# Altium PCB 0-99-pcb.PcbDoc
Units mm, origin at the board's own origin, x right, y up, seen from the top; angles counter-clockwise.
Board outline 100 x 100 mm, 2 copper layers (Top Layer, Bottom Layer); 65 components, 69 nets, 218 pads, 30 vias.
Unrouted connection lines stored in the file: 1.
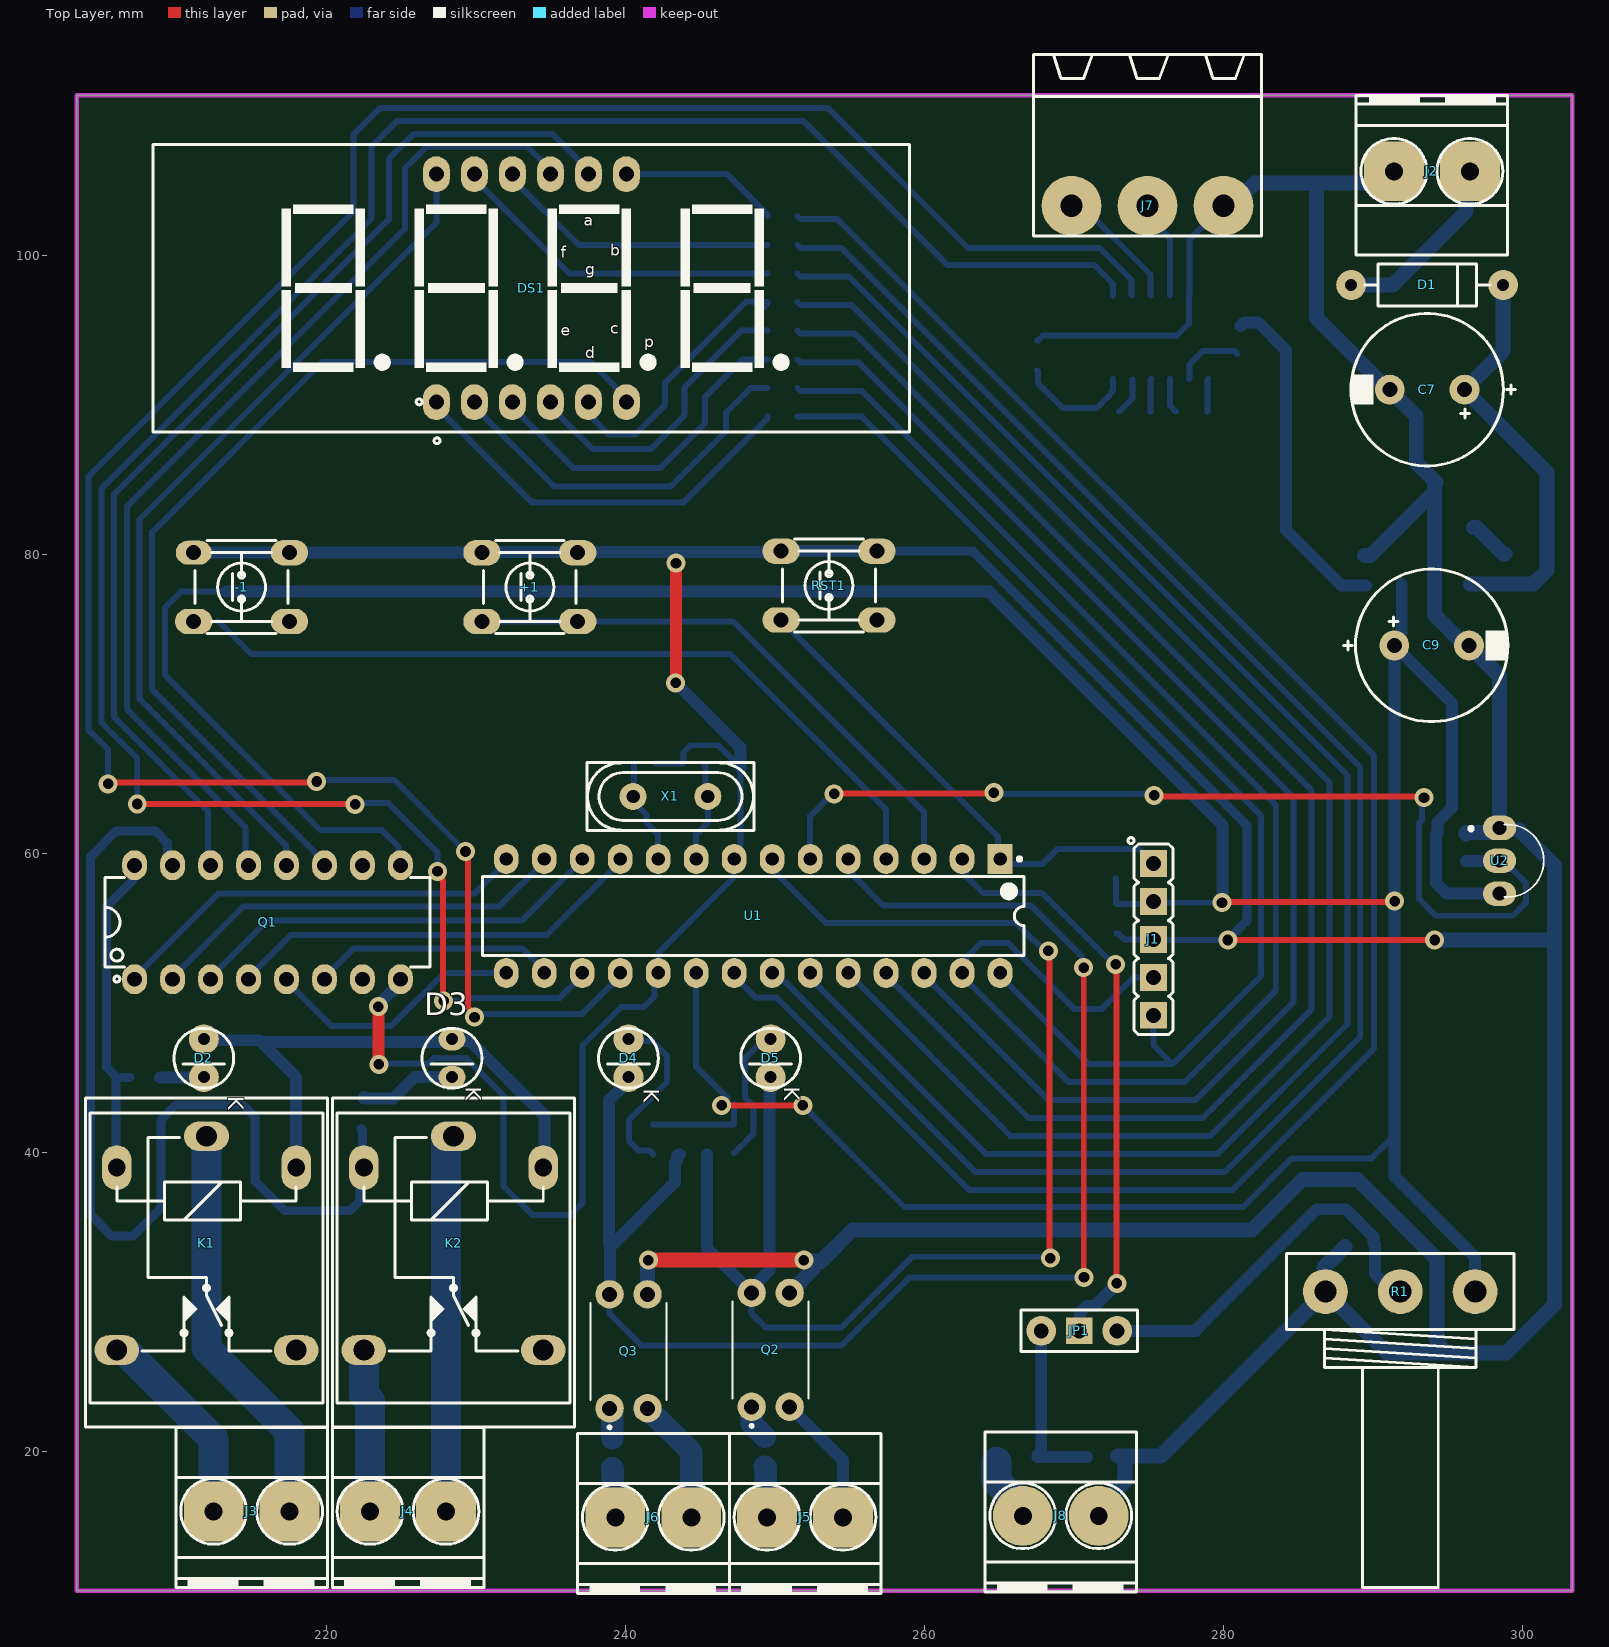
[diagram p0: Top Layer view]
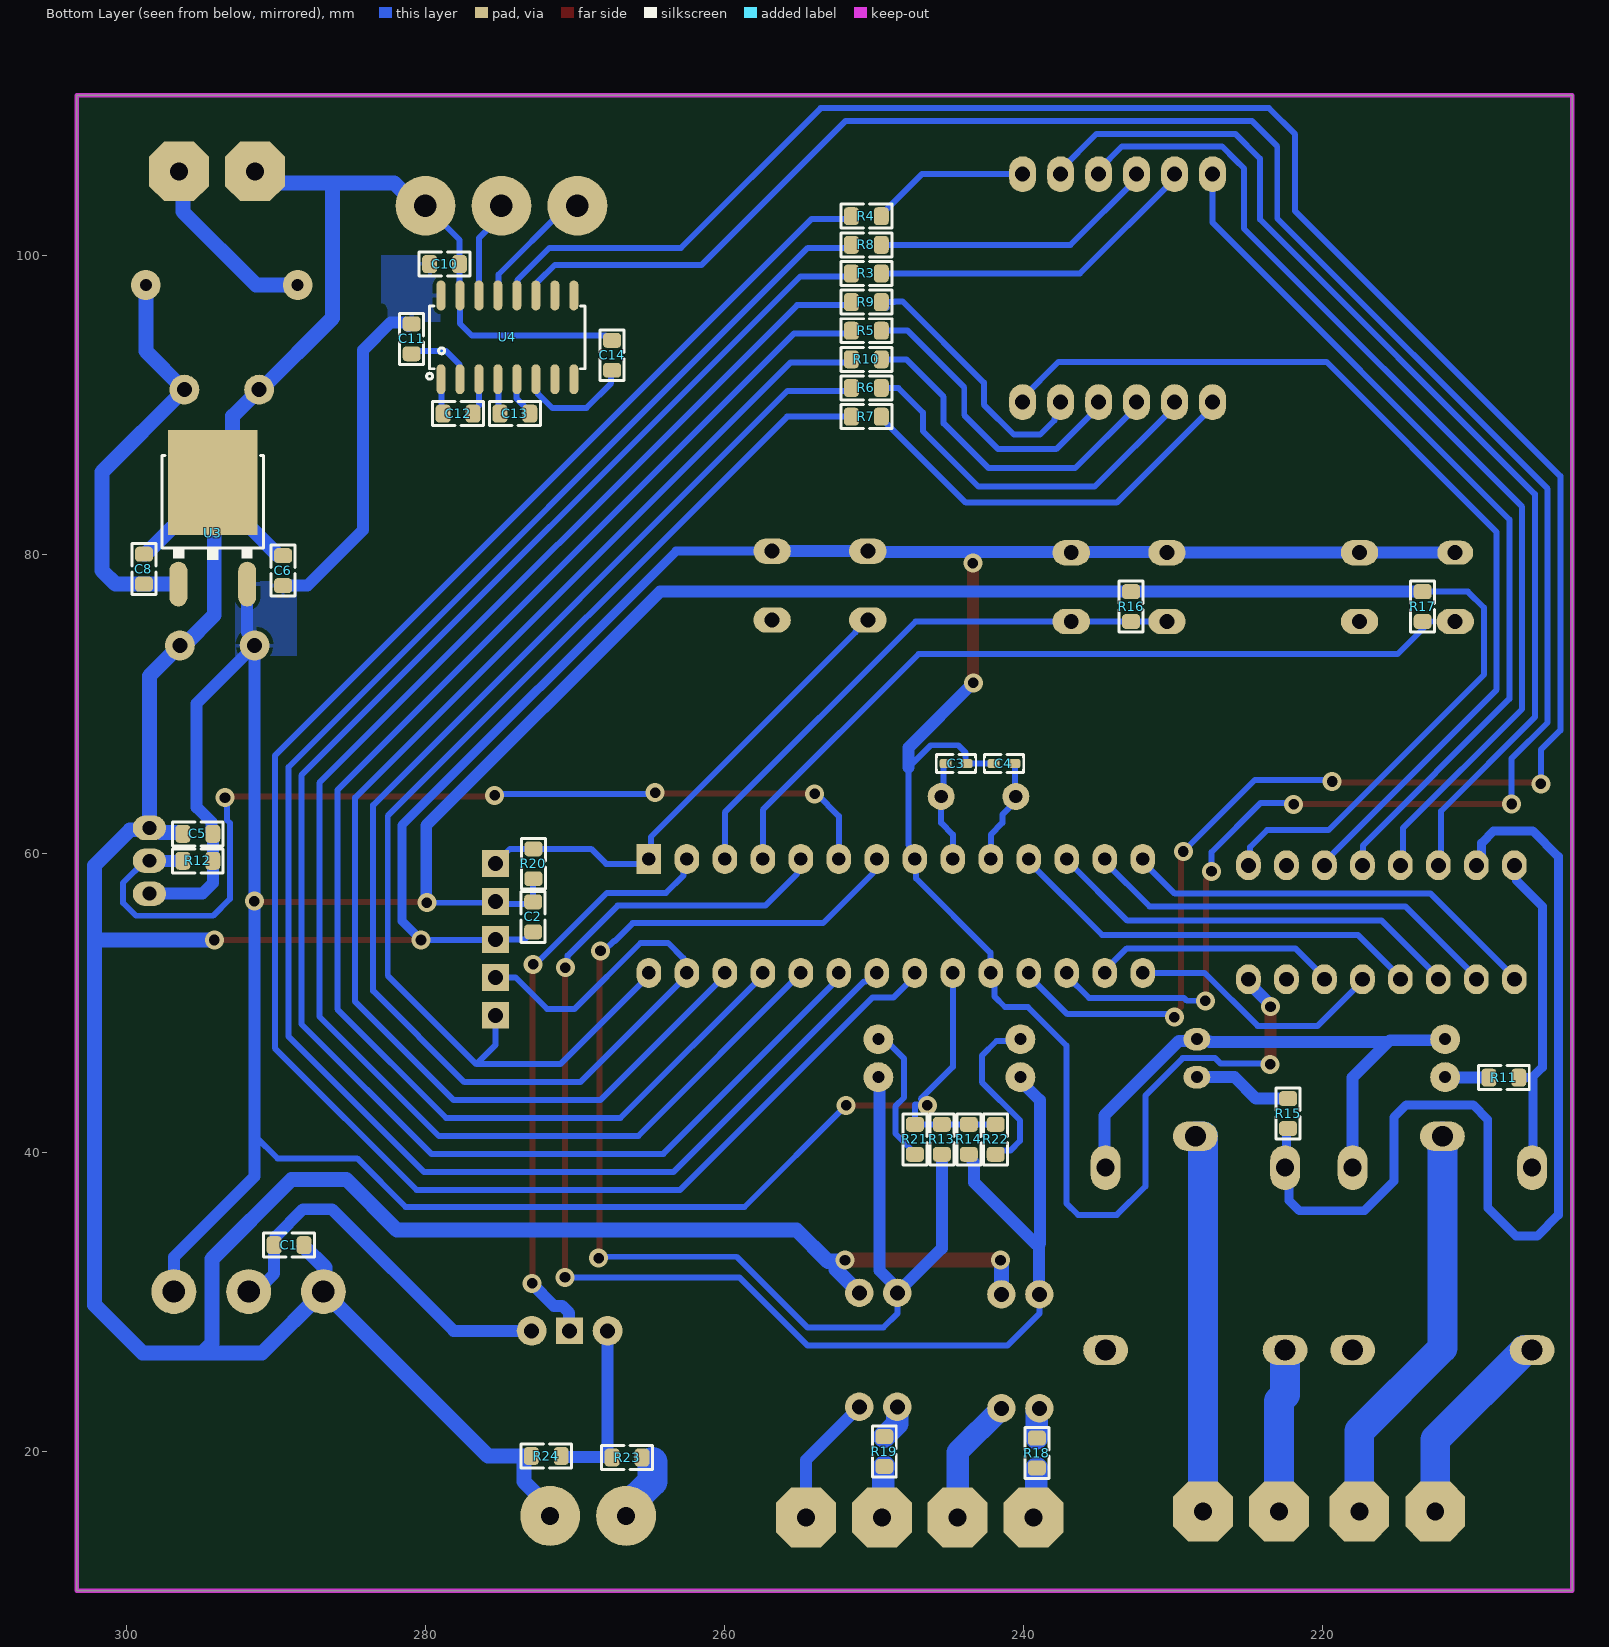
[diagram p1: Bottom Layer view, seen from below]

## Layer stack, top to bottom
Top Solder: solder mask 0.0102, Solder Resist, Dk 3.5
Top Layer: signal copper 0.0356
Dielectric 1: dielectric 0.32, FR-4, Dk 4.8
Bottom Layer: signal copper 0.0356
Bottom Solder: solder mask 0.0102, Solder Resist, Dk 3.5

## Board outline
203.3,10.7 203.3,110.7 303.3,110.7 303.3,10.7

## Design rules (kind name [scope] priority, off if disabled: settings)
Clearance [All] p1: gap=0.3 ignorepadtopadclearanceinfootprint=FALSE
ComponentClearance [All] p1 off: gap=0.254 collisioncheckmode=3 verticalgap=0.254 showdistances=FALSE
MinimumSolderMaskSliver [All] p1: minsoldermaskwidth=0.1
PolygonConnect [All] p1: connectstyle=Relief reliefconductorwidth=0.254 reliefentries=4 polygonreliefangle="90 Angle" airgapwidth=0.254
RoutingVias [All] p1: holewidth=0.711 width=1.27 viastyle="Through Hole" minholewidth=0.711 minwidth=1.27 maxholewidth=0.711 maxwidth=1.27
SilkToSolderMaskClearance [IsText] p1: minsilkscreentomaskgap=0.254 clearancetoexposedcopper=TRUE
SolderMaskExpansion [All] p1: expansion=0.102 istentingtop=FALSE
Width [All] p1: maxlimit=2 minlimit=0.4 preferedwidth=0.6
27 further rules are at their usual default settings.

## Classes and differential pairs
component class MAX232_0-99_Counter: C10 C11 C12 C13 C14 J7 U4
component class 0-99_Counter: +1 -1 C1 C2 C3 C4 C5 C6 C7 C8 C9 D1 D2 D3 D4 D5 DS1 J1 J2 J3 J4 J5 J6 J8 JP1 K1 K2 Q1 Q2 Q3 R1 R3 R4 R5 R6 R7 R8 R9 R10 R11 R12 R13 R14 R15 R16 R17 R18 R19 R20 R21 R22 R23 R24 RST1 U1 U2 U3 X1 Y1

## Components (designator, comment, footprint, x,y, rotation, side; value= is the part's Value field where it differs from the comment)
+1 "Tactile 4PIN 6X6mm H5mm (THD)" SWPBT_SPDT_6X6X5SKHH#1 233.6,77.8 r0 top
-1 "Tactile 4PIN 6X6mm H5mm (THD)" SWPBT_SPDT_6X6X5SKHH#2 214.325,77.8 r0 top
C1 "-F" C0805 289.1,33.8 r180 bottom
C2 "-F" C0805 272.775,55.75 r90 bottom
C3 "22 pF" C0603 244.5,66 r180 bottom
C4 "22 pF" C0603 241.3,66 r0 bottom
C5 "-F" C0805 295.2,61.3 r0 bottom
C6 "-F" C0805 289.5,78.9 r270 bottom
C7 "100uF" C_EL_10X12 293.6,91 r180 top
C8 "-F" C0805 298.8,79 r270 bottom
C9 "100uF" C_EL_10X12 293.9,73.9 r0 top
C10 "-F" C0805 278.7,99.4 r0 bottom
C11 "-F" C0805 280.9,94.4 r270 bottom
C12 "-F" C0805 277.8,89.4 r0 bottom
C13 "-F" C0805 274,89.4 r0 bottom
C14 "-F" C0805 267.5,93.3 r270 bottom
D1 "1N4007" D_AX04_DO41 293.6,98 r0 top
D2 "LED0" LED3MM#1 211.8,46.3 r270 top
D3 "LED0" LED3MM#2 228.4,46.3 r270 top
D4 "LED1" LED3MM#1 240.2,46.3 r270 top
D5 "LED1" LED3MM#1 249.7,46.3 r270 top
DS1 "7SEG_4DIGIT_CC" 7SEGX4_12 233.7,97.787 r0 top locked
J1 "HDR1X5" HDR_M_1X5 275.3,54.25 r270 top value=HDRM5
J2 "CONN_TB2" TBG_2#1 293.916,105.6 r0 top
J3 "CONN_TB2" TBG_2#1 215,16 r180 top
J4 "CONN_TB2" TBG_2#1 225.452,16 r180 top
J5 "CONN_TB2" TBG_2#1 252,15.6 r180 top
J6 "CONN_TB2" TBG_2#1 241.855,15.6 r180 top
J7 "CONN_TB3" MSTB_3 274.9,103.3 r0 top
J8 "CONN_TB2" TBG_2#2 269.1,15.7 r180 top
JP1 "JMPHDR3PIN" JP_3 270.335,28.075 r180 top
K1 "RELAY_SPDT" REL_SPDT_5_2216 211.98,38.98 r0 top
K2 "RELAY_SPDT" REL_SPDT_5_2216 228.497,38.98 r0 top
Q1 "ULN2003" DIP_16 216.06,55.39 r90 top
Q2 "PC817C" DIP762W50P254L650H458Q4B 249.7,26.8 r90 top
Q3 "PC817C" DIP762W50P254L650H458Q4B 240.2,26.7 r90 top
R1 "POT10K" VOL_R 291.8,30.7 r180 top
R3 "10K" R0805 250.5,98.771 r180 bottom
R4 "10K" R0805 250.5,102.6 r180 bottom
R5 "10K" R0805 250.5,94.943 r180 bottom
R6 "10K" R0805 250.5,91.114 r180 bottom
R7 "10K" R0805 250.5,89.2 r180 bottom
R8 "10K" R0805 250.5,100.686 r180 bottom
R9 "10K" R0805 250.5,96.857 r180 bottom
R10 "10K" R0805 250.5,93.029 r180 bottom
R11 "" R0805 207.875,45 r180 bottom
R12 "10K" R0805 295.2,59.5 r180 bottom
R13 "10K" R0805 245.45,40.875 r90 bottom
R14 "10K" R0805 243.65,40.875 r90 bottom
R15 "" R0805 222.3,42.6 r90 bottom
R16 "10K" R0805 232.8,76.5 r90 bottom
R17 "10K" R0805 213.3,76.5 r90 bottom
R18 "10K" R0805 239.1,19.9 r90 bottom
R19 "10K" R0805 249.3,20 r270 bottom
R20 "10K" R0805 272.76,59.3 r270 bottom
R21 "10K" R0805 247.25,40.875 r90 bottom
R22 "10K" R0805 241.85,40.875 r90 bottom
R23 "10K" R0805 266.5,19.6 r180 bottom
R24 "10K" R0805 271.9,19.7 r0 bottom
RST1 "Tactile 4PIN 6X6mm H5mm (THD)" SWPBT_SPDT_6X6X5SKHH#1 253.6,77.9 r0 top
U1 "PIC16F876A-E/SP" SPDIP300-SP28 248.53,55.81 r270 top
U2 "DS18B20" TO-92-TO92127P495H2044-3 299.2,59.5 r270 top
U3 "L78M05CDT" DPAK_3 294.2,78 r180 bottom
U4 "MAX232" SO_16 274.5,94.5 r90 bottom
X1 "XTL_12MHz" XTLT_2 243,63.8 r180 top locked

## Footprints (in the part's own frame and the unit in brackets; to place one, negate y for a bottom-side part, rotate by r counter-clockwise, add the part's x,y. Pads: shape width x height; smd on the part's side, far side on the other; paste and mask are expansions set on the pad)
7SEGX4_12 [mm] "7SEG 4DIGIT 12pin Pitch: 2.54mm    5641 0.56\", 19X50.3mm"
  oval 1.8x2.4 hole 1: 1(-6.35,-7.62) 2(-3.81,-7.62) 3(-1.27,-7.62) 4(1.27,-7.62) 5(3.81,-7.62) 6(6.35,-7.62) 7(6.35,7.62) 8(3.81,7.62) 9(1.27,7.62) 10(-1.27,7.62) 11(-3.81,7.62) 12(-6.35,7.62)
  silkscreen extent -25.3,-10.4 25.3,9.6, body extent -25.2,-9.5 25.2,9.5, height 8
C0603 [mm] "CHIP Capacitor, 1.6X0.8mm, 0603"
  rrect50% 0.8x0.6 smd mask+0.075: 1(-0.7,0) 2(0.7,0)
  silkscreen extent -1.33,-0.6 1.32,0.6, body extent -0.8,-0.4 0.8,0.4, height 0.9
C0805 [mm] "CHIP Capacitor, 2.0X1.3mm, 0805"
  rrect50% 1x1.2 smd mask+0.075: 1(-1,0) 2(1,0)
  Top Layer pour cut-out: -0.5,0.8 0.5,0.8 0.5,-0.8 -0.5,-0.8
  silkscreen extent -1.7,-0.8 1.7,0.8, body extent -1,-0.63 1,0.62, height 1
C_EL_10X12 [mm] "Cap Elec, D10.0X12.0H pitch: 5.0mm"
  round 2 hole 1: 1(-2.5,0) 2(2.5,0)
  silkscreen extent -5.9,-5.1 5.1,5.1, body extent -5.07,-5.08 5.05,5.04, height 13.7
D_AX04_DO41 [mm] "DIODE 0.4 INCH SPACING DO-41"
  round 2 hole 0.8: 1(-5.08,0) 2(5.08,0)
  silkscreen extent -4.2,-1.4 4.2,1.4, body extent -5.68,-1.32 5.68,1.4, height 2.85
DIP762W50P254L650H458Q4B [mm]
  round 1.9 hole 1: 1(-3.81,1.27) 2(-3.81,-1.27) 3(3.81,-1.27) 4(3.81,1.27)
  silkscreen extent -5.18,-2.54 3.25,2.54, body extent -3.94,-2.29 3.94,2.29, height 4.8
DIP_16 [mm] "DIP, pitch 2.54mm, 300mil Width"
  oval 2x1.65 hole 1: 1(-3.81,8.89) 2(-3.81,6.35) 3(-3.81,3.81) 4(-3.81,1.27) 5(-3.81,-1.27) 6(-3.81,-3.81) 7(-3.81,-6.35) 8(-3.81,-8.89) 9(3.81,-8.89) 10(3.81,-6.35) 11(3.81,-3.81) 12(3.81,-1.27) 13(3.81,1.27) 14(3.81,3.81) 15(3.81,6.35) 16(3.81,8.89)
  silkscreen extent -4,-10.87 3,10.87, body extent -3.93,-10 3.94,10, height 5.1
DPAK_3 [mm] "D-PAK (TO-252), 3-Pads, Body 6.2x6.7mm"
  oval 1.2x3 smd: 1(-2.3,0) 3(2.3,0)
  rect 6x7 smd: 4(0,6.8)
  silkscreen extent -3.4,1.63 3.4,8.6, body extent -3.37,-0.5 3.37,9.6, height 2.37
HDR_M_1X5 [mm] "Connector; Header; 5 Position"
  rect 1.8x1.8 hole 1 mask+0.1: 1(-5.08,0) 2(-2.54,0) 3(0,0) 4(2.54,0) 5(5.08,0)
  silkscreen extent -6.8,-1.7 6.38,1.3, body extent -6.35,-1.27 6.35,1.27, height 8.54
JP_3 [mm] "Jumper Header 2.54mm Pitch, 3PIN, Vertical"
  round 2 hole 1: 1(-2.54,0) 3(2.54,0)
  rect 1.8x1.8 hole 1: 2(0,0)
  silkscreen extent -3.9,-1.4 3.9,1.4, body extent -3.82,-1.27 3.8,1.27, height 8.57
LED3MM#1 [mm] "LED THD 3MM"
  round 2 hole 0.8: 1(-1.27,0) 2(1.27,0)
  silkscreen extent -2,-2 2,2, body extent -1.9,-1.9 1.6,1.9, height 6.5
LED3MM#2 [mm] "LED THD 3MM"
  oval 1.5x1.8 hole 0.8: 1(-1.27,0) 2(1.27,0)
  silkscreen extent -2,-2 2,2, body extent -1.9,-1.9 1.6,1.9, height 6.5
MSTB_3 [mm] "PHOENIX MSTB 2, 5-G, 5.08mm pitch, 3pin"
  round 4 hole 1.5: 1(-5.08,0) 2(0,0) 3(5.08,0)
  silkscreen extent -7.62,-2.03 7.62,10.1, body extent -7.5,-2 7.5,10, height 8.6
R0805 [mm] "CHIP RESISTOR 1/8 WATT ,2.0X1.3mm, 0805, 2012"
  rrect50% 1x1.2 smd mask+0.05: 1(-1,0) 2(1,0)
  Top Layer pour cut-out: -0.5,0.8 0.5,0.8 0.5,-0.8 -0.5,-0.8
  silkscreen extent -1.7,-0.8 1.7,0.8, body extent -1.15,-0.68 1.15,0.67, height 0.76
REL_SPDT_5_2216 [mm] "RELAY SPDT, OMRON G5LE SERIES, 22X16mm and 18.8x15.4mm, HJR-3FF, RAS-1215"
  oval 3x2 hole 1.4: 1(0,2.1) 2(6,-12.2) 3(-6,-12.2)
  oval 2x3 hole 1.2: 4(-6,0) 5(6,0)
  silkscreen extent -8.1,-17.35 8.1,4.65, body extent -7.95,-15.75 7.95,3.75, height 15.5
SO_16 [mm] "SOP, SOIC, 3.9mm width, 1.27mm pitch,"
  oval 2x0.6 smd: 1(-2.8,4.445) 2(-2.8,3.175) 3(-2.8,1.905) 4(-2.8,0.635) 5(-2.8,-0.635) 6(-2.8,-1.905) 7(-2.8,-3.175) 8(-2.8,-4.445) 9(2.8,-4.445) 10(2.8,-3.175) 11(2.8,-1.905) 12(2.8,-0.635) 13(2.8,0.635) 14(2.8,1.905) 15(2.8,3.175) 16(2.8,4.445)
  silkscreen extent -2.8,-5.2 2.1,5.4, body extent -3.1,-4.95 3.1,4.95, height 1.7
SPDIP300-SP28 [mm] "DIP, 28-Leads, Row Spacing 7.62mm, Pitch 2.54mm, Body 34.9x6.8mm"
  rect 2x1.65 hole 0.9: 1(-3.81,16.51)
  oval 2x1.65 hole 0.9: 2(-3.81,13.97) 3(-3.81,11.43) 4(-3.81,8.89) 5(-3.81,6.35) 6(-3.81,3.81) 7(-3.81,1.27) 8(-3.81,-1.27) 9(-3.81,-3.81) 10(-3.81,-6.35) 11(-3.81,-8.89) 12(-3.81,-11.43) 13(-3.81,-13.97) 14(-3.81,-16.51) 15(3.81,-16.51) 16(3.81,-13.97) 17(3.81,-11.43) 18(3.81,-8.89) 19(3.81,-6.35) 20(3.81,-3.81) 21(3.81,-1.27) 22(3.81,1.27) 23(3.81,3.81) 24(3.81,6.35) 25(3.81,8.89) 26(3.81,11.43) 27(3.81,13.97) 28(3.81,16.51)
  silkscreen extent -3.93,-18.1 2.65,18.1, body extent -3.55,-18.1 3.55,18.1, height 5.08
SWPBT_SPDT_6X6X5SKHH#1 [mm] "SWITCH, PUSHBUTTON, THD, SPDT, 6X6X5.0 mm Height ; 1,000,000 cycles ; 0.98N Force, SKHHAKA010"
  oval 2.5x1.7 hole 1 mask+0.1: 1(-3.2,2.3) 2(-3.2,-2.3) 3(3.2,-2.3) 4(3.2,2.3)
  silkscreen extent -3.1,-3.1 3.1,3.1, body extent -3.95,-3.1 3.95,3.1, height 5.03
SWPBT_SPDT_6X6X5SKHH#2 [mm] "SWITCH, PUSHBUTTON, THD, SPDT, 6X6X5.0 mm Height ; 1,000,000 cycles ; 0.98N Force, SKHHAKA010"
  oval 2.4x1.6 hole 1 mask+0.1: 1(-3.2,2.3)
  oval 2.5x1.7 hole 1 mask+0.1: 2(-3.2,-2.3) 3(3.2,-2.3) 4(3.2,2.3)
  silkscreen extent -3.1,-3.1 3.1,3.1, body extent -3.95,-3.1 3.95,3.1, height 5.03
TBG_2#1 [mm] "Terminal Block Green"
  oct 4x4 hole 1.2: 1(-2.54,0) 2(2.54,0)
  silkscreen extent -5.08,-5.6 5.05,5.08, body extent -5,-5.5 5,5, height 14
TBG_2#2 [mm] "Terminal Block Green"
  round 4 hole 1.2: 1(-2.54,0) 2(2.54,0)
  silkscreen extent -5.08,-5.6 5.05,5.08, body extent -5,-5.5 5,5, height 14
TO-92-TO92127P495H2044-3 [mm]
  oval 1.65x2.22 hole 0.93: 1(-2.2,-0.76) 2(0,-0.76) 3(2.2,-0.76)
  silkscreen extent -2.43,-2.79 2.43,2.2, body extent -2.28,-1.84 2.28,1.78, height 20.45
VOL_R [mm] "VOULME RIGHT ANGLE"
  round 3 hole 1.5: 1(-5,0) 2(0,0) 3(5,0)
  silkscreen extent -7.62,-2.54 7.62,19.78, body extent -10.76,-5 10.93,27.8, height 24.54
XTLT_2 [mm] "Crystal PTH HC49S"
  round 1.8 hole 0.9: 1(-2.5,0) 2(2.5,0)
  silkscreen extent -5.59,-2.29 5.59,2.29, body extent -5.67,-2.32 5.67,2.33, height 3.6

## Part data
+1 -1 RST1: "Tactile Switch SPST-NO Top Actuated Surface Mount", PartNumber="PTS645SH50SMTR92 LFS"
C1 C2 C5 C6 C8 C10 C11 C12 C13 C14: library part CAP_SMD_MLCC_0805, "CAP, MLCC, -F, -V, MATERIAL, -%, 0201", ASSEMBLY=ASSEMBLY, MANF=-, MANF_P#=MANF_PART#, PARAM="-, -%", PARAM2=-V, PRICE="100= 1$"
C3 C4: library part CERAMIC-1NF-50V-5%-C0G(0603), MPN=GRM1885C1H102JA01D
C7 C9: library part CAP_THD_EL, "CAP, THD, ELEC,", ASSEMBLY=ASSEMBLY, DESC=DESCRIPTION, DIST#=MOUSER, MANF=MANF, MANF_P#=MANF_PART#, PARAM=25V, PARAM2=20%, PRICE="10= 5$"
D1: library part DIODE_THD_1N4007, "DIODE, GENERAL PURPOSE, 1000V/1A", ASSEMBLY=ASSEMBLY, DESC=DESCRIPTION, MANF=Diodes, MANF_P#=1N4007, PARAM="1000V, 1.15V", PARAM2=1.5A, PRICE=PRICE
D2 D3: "Typical INFRARED GaAs LED", LatestRevisionDate=08-Jul-2005, LatestRevisionNote="Mech Layer 1 removed.", PackageDescription="LED; 2 Leads", PackageReference=LED-0, Published=8-Jun-2000, Publisher="Altium Limited"
D4 D5: "Typical RED GaAs LED", LatestRevisionDate=08-Jul-2005, LatestRevisionNote="Mech Layer 1 removed.", PackageDescription="LED; 2 Leads", PackageReference=LED-1, Published=8-Jun-2000, Publisher="Altium Limited"
DS1: "7SEGMENT, 4DIGIT, common cathode 5641", MANF_P#=DPY-4CK
J1: library part HDR_M_1X5, "CONN, HEADER, Male, pitch: 2.54mm, 5POS"
J2 J3 J4 J5 J6 J8: "CONN, TERMINAL BLOCK, 5.08mm pitch"
J7: library part CONN_MSTB_3, "CONN, PHOENIX MSTB, 5-G, 5.08mm pitch"
JP1: library part JUMPER_HDR_3P, "JUMPER, HEADER 3PIN", MANF=MANF, MANF_P#=MANF_P#
K1 K2: library part RELAY_SPST_5_2216_G5LE, "Relay, SPDT, 5P, 22X16mm, 120V/10A", MANF=OMRON, MANF_P#=G5LE-1, PARAM="12V, 50mA", PARAM2="250VAC, 10A", PRICE=PRICE
Q1: library part ULN2004_DIP16, "Darlington, 7-CH, 50V, 0.5A, 6~15V CMOS/PMOS", MANF=ST, MANF_P#=ULN2004A, PARAM="7-CH, 50V, 0.5A", PARAM2="6~15V CMOS/PMOS"
Q2 Q3: "Optoisolator Transistor Output 5000Vrms 1 Channel 4-DIP", Package="DIP-4 Taiwan Semiconductor", Availability=Unavailable, MF="Taiwan Semiconductor", MP=PC817C, PRICE=None, SnapEDA_Link=https://www.snapeda.com/parts/PC817C/Taiwan%20Semiconductor%20Corporation/view-part/2816187/?ref=snap
R1: library part RES_THD_POT_VOL, "RESISTOR, THD, Potentiometer Volume"
R3 R4 R5 R6 R7 R8 R9 R10 R13 R14 R17 R20 R21 R22 R23 R24: library part RES_THD, "RESISTOR, THD", ASSEMBLY=ASSEMBLY, DESC=DESCRIPTION, DIST#=MOUSER, MANF="KOA SPEER", MANF_P#=RK73H1ETTP4701F, PARAM=0.063W, PARAM2=1%, PRICE="100= 0.5$"
R11 R15: library part RES_THT
R12 R16 R18 R19: library part RES_THD, "RESISTOR, THD 4K7", ASSEMBLY=ASSEMBLY, DESC=DESCRIPTION, DIST#=MOUSER, MANF="KOA SPEER", MANF_P#=RK73H1ETTP4701F, PARAM=0.063W, PARAM2=1%, PRICE="100= 0.5$"
U1: "Enhanced FLASH Microcontroller, 8K (x14-Bit words) FLASH, 368 Bytes RAM, 28-Pin PDIP 300mil, Standard VDD Range, Extended Temperature", Supplier Part Number 1=PIC16F876A-E/SP-ND, ComponentAvailability="Unknown. Contact manufacturer to determine status.", ComponentLink1Description=Datasheet, ComponentLink1URL=http://ww1.microchip.com/downloads/en/DeviceDoc/39582b.pdf, ComponentLink2Description="Packaging Specification", ComponentLink2URL=http://www.microchip.com/stellent/groups/techpub_sg/documents/packagingspec/en012702.pdf, ComponentLink3Description="Microchip.com Home", ComponentLink3URL=http://www.microchip.com/, DatasheetVersion="revB, Oct-2003", LatestRevisionDate=29-Jan-2009, LatestRevisionNote="Sch. layout revised. 3D Model Removed.", PackageDescription="28-Lead Skinny Plastic Dual In-Line (SP) - 300 mil Body [SPDIP]", PackageReference=SPDIP300-SP28, PackageVersion="revBB, Aug-2009", Published=11-Oct-2004, Publisher="Altium Limited", Supplier 1=Digi-Key
U2: "Temperature Sensor Digital, Local -55Â°C ~ 125Â°C 12 b TO-92-3", Package="TO-92 Maxim Integrated", Availability=Unavailable, MF="Maxim Integrated", MP=DS18B20, PRICE=None, SnapEDA_Link=https://www.snapeda.com/parts/DS18B20/Maxim%20Integrated/view-part/1266091/?ref=snap
U3: library part VREG_78M05_TO252, "REG, Linear, Fixed, 5v, 0.5A, TO-252", MANF="TI, ST, FAIRCHILD, ON, NJR, ROHM, DIODES", MANF_P#="LM78M05CDT, L7805CDT, MC7805BDT, MC78M05CDT, MC7805BDT, KA7805ERT, NCV7805BDT, BA7805FP, NJM7805DL1A, AS7805ADTR", PARAM="5v, 0.5A", PARAM2=PARAM2
U4: library part MAX232_SOP16, "RS-232, DUAL, +5V, Driver/Receiver", MANF="Maxim Integrated", MANF_PART#=MAX232ACSE, PARAM=PARAM, PRICE=2000toman@PAYA
X1: library part XTL_2_HC49_SMD, "Crystal MOST POPULAR ABL HC49 PACKAGE"

## Via types
v1: diameter 1.27, hole 0.711, Top Layer to Bottom Layer, 30 vias

## Nets (pads, with @x,y where several pads share a name; then routed paths per layer and width w, separated by ;. In a path a pad name is that pad's centre, name@x,y a point inside that pad or via, vN(x,y) a via of type N, cw(c..) or ccw(c..) an arc to the next point about the centre after c; other vN are vias at no path point)
A_PIN: R3.1 U1.23 | length 112.1
  Bottom Layer w0.4: R3.1 251.7,98.571 254.914,98.571 288.275,65.21 288.275,48.59 279.585,39.9 264.075,39.9 252.34,51.635 U1.23
B_PIN: R4.1 U1.21 | length 125.9
  Bottom Layer w0.4: U1.21 247.26,51.79 248.7,50.35 250.1,50.35 262.95,37.5 280.579,37.5 290.05,46.971 290.05,66.525 254.175,102.4 251.7,102.4 R4.1
C1: DS1.12 Q1.12 | length 58.5
  Bottom Layer w0.4: Q1.12@217.38,59.2 217.307,59.273 217.307,60.518 207.5,70.325 207.5,82.322 227.35,102.172 DS1.12
C2: DS1.9 Q1.13 | length 69
  Bottom Layer w0.4: Q1.13@214.84,59.2 214.601,59.439 214.601,61.699 206.65,69.65 206.65,83.169 225.25,101.769 225.25,105.799 225.8,106.349 226.708,107.257 227.992,107.257 229.248,107.257 230.532,107.257 231.788,107.257 233.42,107.257 234.97,105.707 DS1.9
C3: DS1.8 Q1.14 | length 72.9
  Bottom Layer w0.4: Q1.14@212.3,59.2 212.067,59.433 212.067,62.833 205.8,69.1 205.8,84.016 224.175,102.391 224.175,106.45 225.832,108.107 235.11,108.107 237.51,105.707 DS1.8
C4: DS1.6 Q1.11 | length 64.8
  Bottom Layer w0.4: Q1.11@219.92,59.2 219.92,59.375 208.35,70.945 208.35,81.475 219.725,92.85 237.667,92.85 240.05,90.467 DS1.6
C_PIN: R5.1 U1.25 | length 97.3
  Bottom Layer w0.4: R5.1 251.7,94.743 255.348,94.743 285.875,64.216 285.875,49.584 278.591,42.3 266.945,42.3 257.42,51.825 U1.25
D_PIN: J1.4 R6.1 U1.27 | length 99.3
  Bottom Layer w0.4: R6.1 251.7,90.914 255.783,90.914 283.475,63.222 283.475,50.8 277.375,44.7 269.625,44.7 262.5,51.825 U1.27 262.739,52.239 262.739,52.989 263.75,54 265.6,54 270,49.6 271.85,49.6 273.96,51.71 J1.4
DP_PIN: R10.1 U1.26 | length 90
  Bottom Layer w0.4: R10.1 251.7,92.829 255.566,92.829 284.675,63.719 284.675,50.081 278.094,43.5 268.285,43.5 259.96,51.825 U1.26
DQ: R12.1 U1.6 U2.2 | length 65.5
  Top Layer w0.4: v1(253.95,63.975) 253.987,64.012 264.587,64.012 v1(264.625,64.05) ; v1(275.35,63.875) 275.425,63.8 293.31,63.8 v1(293.385,63.725)
  Bottom Layer w0.4: U1.6 252.34,62.49 253.825,63.975 v1(253.95,63.975) ; v1(264.625,64.05) 264.713,63.962 275.263,63.962 v1(275.35,63.875) ; v1(293.385,63.725) 293.25,63.59 293.25,62.223 293.05,62.023 293.05,56.95 294.175,55.825 299.336,55.825 300.2,56.689 300.2,58.025 298.725,59.5 U2.2
  Bottom Layer w0.8: R12.1 U2.2
E_PIN: J1.5 R7.1 U1.28 | length 79.1
  Bottom Layer w0.4: R7.1 255.8,89.2 282.5,62.5 282.5,51.825 276.575,45.9 ; U1.28 265.04,51.825 270.965,45.9 276.575,45.9 ; J1.5 275.3,47.175 276.575,45.9
F_PIN: R8.1 U1.22 | length 118.7
  Bottom Layer w0.4: U1.22 249.963,52 250.519,51.444 250.635,51.444 263.379,38.7 280.082,38.7 289.125,47.743 289.125,65.775 254.414,100.486 251.7,100.486 R8.1
G_PIN: R9.1 U1.24 | length 104.6
  Bottom Layer w0.4: R9.1 251.7,96.657 255.131,96.657 287.075,64.713 287.075,49.087 279.088,41.1 265.75,41.1 254.88,51.97 U1.24
GND: +1.1 +1.4 -1.1 -1.4 C1.2 C2.1 C3.2 C4.2 C5.2 C6.1 C7.2 C8.1 C9.2 C10.1 C14.1 J1.3 J2.1 J7.3 J8.1 Q1.8 Q2.3 Q3.3 R1.3 R24.2 RST1.1 RST1.4 U1.8 U1.19 U2.1 U3.4 U4.15 | length 441.5
  Top Layer w0.4: v1(280.275,54.2) v1(294.1,54.2)
  Top Layer w0.8: v1(223.475,49.75) 223.475,46.275 223.5,46.25 v1(223.5,45.89) ; v1(243.35,71.4) 243.363,71.412 243.363,79.388 v1(243.375,79.4)
  Top Layer w1: v1(241.525,32.8) v1(251.925,32.8)
  Bottom Layer w0.4: v1(223.5,45.89) 223.54,45.93 226.805,45.93 227.175,46.3 229.35,46.3 231.85,43.8 231.85,37.725 233.75,35.825 236.35,35.825 237.125,36.6 237.125,47.15 239.7,49.725 241.225,49.725 241.941,50.441 241.941,51.761 U1.19 242.21,52.03 242.21,53.36 247.17,58.32 247.17,59.53 U1.8 247.26,60.133 247.675,60.548 247.675,65.75 246.2,67.225 244.35,67.225 243.878,66.753 243.878,66.078 C3.2 C4.2 ; C14.1 267.6,94.3 267.925,94.625 276.875,94.625 277.675,95.425 U4.15 ; C2.1@272.825,54.625 272.952,54.625 273.327,54.25 J1.3 275.35,54.2 v1(280.275,54.2) ; U4.15@277.7,97.325 C10.1 277.7,101.02 J7.3 ; 301.925,54.2 302.1,54.375
  Bottom Layer w0.6: RST1.4 263.226,80.2 281.55,61.876 281.55,55.475 v1(280.275,54.2)
  Bottom Layer w0.8: -1.1@210.7,80.1 +1.1 230.45,80.15 243.35,80.15 243.35,79.425 v1(243.375,79.4) ; v1(223.475,49.75) 223.475,49.875 224.95,51.35 Q1.8 ; v1(243.35,71.4) 247.675,67.075 247.675,65.75 ; 243.375,80.15 250.35,80.15 RST1.1 RST1.4 ; 286.104,104.816 286.2,104.719
  Bottom Layer w1: Q3.3 241.47,32.745 v1(241.525,32.8) ; Q2.3 252.542,32.182 ; v1(251.925,32.8) 251.977,32.748 253.022,32.748 253.065,32.705 255.16,34.8 281.875,34.8 285.275,38.2 288.925,38.2 294.25,32.875 294.25,27.25 294.9,26.6 ; J8.1 271.64,16.241 273.4,18.001 273.4,19.3 ; R24.2 275.8,19.7 R1.3 ; J7.3 280.55,103.3 282.066,104.816 286.104,104.816 ; C1.2@288.1,33.7 286.7,32.3 286.7,30.8 R1.3 ; C6.1@289.4,79.9 289.8,79.9 291.7,81.8 U3.4@294.1,84.2 ; J2.1 290.583,104.807 286.288,104.807 286.2,104.719 286.2,95.8 291,91 C7.2 292.868,89.232 292.868,86.132 U3.4 294.1,84.7 U3.4@294.1,84.2 ; v1(294.1,54.2) 301.925,54.2 ; C5.2 296.2,61.4 297.679,61.4 297.979,61.7 U2.1 ; U3.4@296.7,81.8 296.9,81.8 298.7,80 C8.1 ; R1.3 290.9,26.6 294.9,26.6 ; U3.4@294.1,84.2 294.1,75.929 296.129,73.9 C9.2 298.44,71.86 U2.1 ; 294.9,26.6 298.9,26.6 302.1,29.8 302.1,54.375 302.1,59.2 299.724,61.576 298.564,61.576 U2.1
IN1: D4.2 Q3.4 R14.1 U1.5 | length 98.8
  Top Layer w0.4: v1(270.625,52.359) 270.638,52.346 270.638,31.662 v1(270.65,31.65)
  Bottom Layer w0.4: Q3.4 238.93,29.225 241.055,27.1 254.444,27.1 258.994,31.65 v1(270.65,31.65) ; U1.5 255.119,59.381 255.119,58.631 257.25,56.5 267.125,56.5 270.472,53.153 270.472,52.511 v1(270.625,52.359)
  Bottom Layer w0.8: Q3.4@238.9,30.65 238.95,30.7 238.95,33.925 ; 238.9,33.925 238.9,35.094 238.9,43.5 240.2,44.8 D4.2 ; 239.225,33.925 243.3,38 243.3,39.306 243.45,39.456 243.45,39.775 243.55,39.875 R14.1
IN2: D5.2 Q2.4 R13.1 U1.7 | length 91.2
  Top Layer w0.4: v1(268.275,53.475) 268.337,53.413 268.337,32.997 v1(268.4,32.935)
  Bottom Layer w0.4: Q2.4 248.43,29.225 249.355,28.3 254.442,28.3 259.167,33.025 268.31,33.025 v1(268.4,32.935) ; U1.7 250.039,59.381 250.039,58.686 253.4,55.325 266.125,55.325 267.298,54.152 267.362,54.152 268.04,53.475 v1(268.275,53.475)
  Bottom Layer w0.8: R13.1 245.45,33.59 Q2.4 248.43,30.908 249.615,32.093 249.615,44.945 D5.2
MCLR: J1.1 R20.1 RST1.2 U1.1 | length 33.3
  Bottom Layer w0.4: RST1.2 250.448,75.6 251.225,74.823 251.225,74.775 264.9,61.1 264.9,59.76 265.36,59.3 267.9,59.3 268.9,60.3 R20.1 274.33,60.3 J1.1
NetC1_1: C1.1 JP1.1 R1.2 | length 26
  Bottom Layer w0.8: JP1.1 278.1,28.075 286.225,36.2 288.175,36.2 290,34.375 290,33.9 C1.1 290.1,31.9 291.3,30.7 R1.2
NetC7_1: C7.1 C8.2 D1.2 U3.1 | length 27.9
  Bottom Layer w1: U3.1 C8.2 300.7,78 301.6,78.9 301.6,85.5 C7.1 298.68,93.58 D1.2
NetC11_2: C11.2 U4.2 | length 4.6
  Bottom Layer w0.4: U4.2 277.713,91.738 277.713,92.688 278.6,93.575 280.725,93.575 C11.2
NetC12_1: C12.1 U4.3 | length 2.3
  Bottom Layer w0.4: U4.3 276.4,91.695 276.4,89.927 C12.1@276.8,89.527
NetC12_2: C12.2 U4.1 | length 2.2
  Bottom Layer w0.4: C12.2@278.907,89.507 278.907,91.662 U4.1
NetC13_1: C13.1 U4.5 | length 2.5
  Bottom Layer w0.4: C13.1@273,89.527 273.9,90.427 U4.5@273.9,91.665
NetC13_2: C13.2 U4.4 | length 2.2
  Bottom Layer w0.4: C13.2@275.097,89.497 275.097,91.662 U4.4
NetC14_2: C14.2 U4.6 | length 7.9
  Bottom Layer w0.4: C14.2 267.566,92.234 267.566,91.434 269.227,89.773 271.5,89.773 272.495,90.768 272.495,90.846 272.595,90.946 U4.6
NetD1_1: D1.1 J2.2 | length 12.5
  Bottom Layer w1: D1.1 291.3,98 296.2,102.9 296.2,105.344 J2.2
NetD2_2: D2.2 R11.1 | length 2.9
  Bottom Layer w0.8: R11.1 208.89,45.015 211.785,45.015 D2.2
NetD3_2: D3.2 R15.2 | length 6.6
  Bottom Layer w0.8: R15.2@222.5,43.7 222.5,43.6 224.448,43.6 225.878,45.03 D3.2
NetD4_1: D4.1 R22.1 | length 11.8
  Bottom Layer w0.4: D4.1 240.32,47.45 241.8,47.45 242.775,46.475 242.775,44.7 240.225,42.15 240.225,40.775 240.856,40.144 241.581,40.144 R22.1
  Bottom Layer w0.8: D4.1 D4.1@240.206,47.57
NetD5_1: D5.1 R21.1 | length 9.4
  Bottom Layer w0.4: R21.1@247.25,39.948 248.565,41.263 248.565,43.079 247.975,43.669 247.975,46.275 249.27,47.57 D5.1
NetDS1_1: DS1.1 R7.2 | length 27.5
  Bottom Layer w0.4: DS1.1 227.35,89.867 233.767,83.45 243.85,83.45 249.5,89.1 R7.2
NetDS1_2: DS1.2 R6.2 | length 25.6
  Bottom Layer w0.4: DS1.2 229.89,89.867 235.232,84.525 243.011,84.525 246.725,88.239 246.725,89.475 248.364,91.114 R6.2
NetDS1_3: DS1.3 R10.2 | length 23.1
  Bottom Layer w0.4: DS1.3 232.43,89.867 236.547,85.75 242.321,85.75 245.325,88.754 245.325,90.525 247.829,93.029 R10.2
NetDS1_4: DS1.4 R5.2 | length 20.4
  Bottom Layer w0.4: DS1.4 234.97,89.867 237.812,87.025 241.682,87.025 243.954,89.296 243.954,91.154 247.743,94.943 R5.2
NetDS1_5: DS1.5 R9.2 | length 18.5
  Bottom Layer w0.4: DS1.5 237.51,89.488 237.92,89.078 237.92,88.955 238.875,88 240.643,88 242.646,90.004 242.646,91.471 248.075,96.9 248.575,96.9 248.618,96.857 R9.2 249.5,96.784 249.204,96.488 R9.2@249.131,96.488
NetDS1_7: DS1.7 R4.2 | length 10.7
  Bottom Layer w0.4: DS1.7 246.793,105.407 249.5,102.7 R4.2
NetDS1_10: DS1.10 R8.2 | length 19.2
  Bottom Layer w0.4: DS1.10 232.43,105.107 236.851,100.686 R8.2
NetDS1_11: DS1.11 R3.2 | length 22.5
  Bottom Layer w0.4: DS1.11 229.89,105.107 236.226,98.771 R3.2
NetJ3_1: J3.1 K1.1 | length 27.4
  Bottom Layer w2: K1.1 211.98,26.92 217.54,21.36 J3.1
NetJ3_2: J3.2 K1.3 | length 13.8
  Bottom Layer w2: K1.3 206.48,26.78 212.46,20.8 J3.2
NetJ4_1: J4.1 K2.1 | length 25.6
  Bottom Layer w2: J4.1 227.992,41.075 227.997,41.08 K2.1
NetJ4_2: J4.2 K2.3 | length 11
  Bottom Layer w2: K2.3 222.5,26.78 222.5,23.8 222.912,23.388 J4.2
NetJ5_1: J5.1 Q2.2 | length 8.9
  Bottom Layer w0.8: Q2.2 254.54,19.42 J5.1
NetJ5_2: J5.2 R19.2 | length 3.5
  Bottom Layer w1.5: R19.2 249.366,18.934 249.366,15.694 J5.2
NetJ6_1: J6.1 Q3.2 | length 8.5
  Bottom Layer w1.5: Q3.2 244.395,19.965 J6.1
NetJ6_2: J6.2 R18.1 | length 3.4
  Bottom Layer w1.5: R18.1 239.143,18.857 239.143,15.772 J6.2
NetJ7_1: J7.1 U4.13 | length 8.7
  Bottom Layer w0.4: J7.1 270.7,103.3 270.7,103.1 275.097,98.703 275.097,97.338 U4.13
NetJ7_2: J7.2 U4.14 | length 6.6
  Bottom Layer w0.4: J7.2 274.9,102.633 276.405,101.128 U4.14
NetJ8_2: J8.2 R23.2 | length 4.3
  Bottom Layer w2: 264.8,19.3 264.8,18.001 266.56,16.241 J8.2
NetJP1_2: JP1.2 U1.2 | length 39.6
  Top Layer w0.4: v1(272.775,52.575) 272.812,52.537 272.812,31.288 v1(272.85,31.25)
  Bottom Layer w0.4: U1.2 262.739,59.381 262.739,58.511 263.9,57.35 267.85,57.35 272.625,52.575 v1(272.775,52.575)
  Bottom Layer w0.8: JP1.2 270.375,28.115 270.375,29.271 270.844,29.74 271.39,29.74 272.85,31.2 v1(272.85,31.25)
NetQ2_1: Q2.1 R19.1 | length 2.4
  Bottom Layer w1.5: Q2.1 248.43,21.87 R19.1
NetQ3_1: Q3.1 R18.2 | length 1.8
  Bottom Layer w1.5: R18.2 Q3.1@239.1,22.72
OSC1: C3.1 U1.9 X1.1 | length 6.8
  Bottom Layer w0.4: U1.9 244.72,61.253 245.5,62.033 X1.1 245.35,63.95 245.35,65.85 C3.1
OSC2: C4.1 U1.10 X1.2 | length 7.1
  Bottom Layer w0.4: C4.1 240.55,65.95 240.55,63.85 X1.2 240.5,63.479 241.4,62.579 241.4,62.033 242.18,61.253 U1.10
Q1: Q1.1 U1.14 | length 28.3
  Bottom Layer w0.4: Q1.1@207.22,51.58 207.22,51.755 212.765,57.3 229.875,57.3 232.02,59.445 U1.14
Q2: Q1.2 U1.13 | length 28.3
  Bottom Layer w0.4: Q1.2@209.76,51.58 209.76,51.755 214.455,56.45 231.565,56.45 234.56,59.445 U1.13
Q3: Q1.3 U1.12 | length 28.3
  Bottom Layer w0.4: Q1.3@212.3,51.58 212.3,51.755 216.045,55.5 233.05,55.5 237.1,59.55 U1.12
Q4: Q1.4 U1.11 | length 28.3
  Bottom Layer w0.4: Q1.4@214.84,51.58 214.84,51.755 217.635,54.55 234.745,54.55 239.64,59.445 U1.11
Q5: Q1.5 U1.15 | length 17.3
  Bottom Layer w0.4: Q1.5@217.38,51.405 220.32,48.465 224.34,48.465 227.875,52 U1.15
Q6: Q1.6 U1.16 | length 16.4
  Bottom Layer w0.4: Q1.6@219.92,51.58 219.92,51.755 221.815,53.65 233.085,53.65 234.56,52.175 U1.16
RA1: +1.2 +1.3 R16.1 U1.3 | length 38
  Bottom Layer w0.4: +1.2 R16.1 +1.3 247.2,75.5 259.96,62.74 U1.3
RA2: -1.2 R17.1 U1.4 | length 53.2
  Bottom Layer w0.4: 212.7,75.5 212.8,75.5 213,75.3 214.975,73.325 247,73.325 257.42,62.905 U1.4
RLY1: K1.4 Q1.16 R11.2 | length 22.3
  Bottom Layer w0.6: K1.4 205.94,39.02 205.94,45.05 ; R11.2 205.99,45 205.94,45.05 ; Q1.16@207.22,59.2 207.019,58.999 207.019,58.169 205.3,56.45 205.3,45.69 205.94,45.05
RLY2: K2.4 Q1.15 R15.1 | length 68.2
  Bottom Layer w0.6: Q1.15@209.76,59.2 209.76,59.605 209.363,60.002 209.363,60.687 208.55,61.5 205.95,61.5 204.23,59.78 204.23,35.82 205.65,34.4 207.05,34.4 208.95,36.3 208.95,42.2 209.925,43.175 214.4,43.175 215.225,42.35 215.225,38.075 217.2,36.1 221.549,36.1 222.229,36.781 222.229,38.712 K2.4 222.399,39.078 222.399,41.501 R15.1
RX: U1.18 U4.12 | length 158.6
  Top Layer w0.4: v1(205.4,64.65) 205.475,64.725 219.275,64.725 v1(219.35,64.8) ; v1(229.3,60.125) 229.46,59.965 229.46,49.725 229.9,49.285 v1(229.9,49.05)
  Bottom Layer w0.4: v1(205.4,64.65) 205.4,66.925 204.1,68.225 204.1,85.215 221.825,102.94 221.825,108.075 223.575,109.825 253.55,109.825 262.9,100.475 271.7,100.475 273.827,98.348 273.827,97.338 U4.12 ; v1(219.35,64.8) 219.45,64.9 224.525,64.9 v1(229.3,60.125) ; v1(229.9,49.05) 230.1,49.25 237.065,49.25 239.64,51.825 U1.18 U1.18@239.64,52.393
TX: U1.17 U4.11 | length 149.7
  Top Layer w0.4: v1(207.35,63.3) 207.363,63.287 221.913,63.287 v1(221.925,63.275) ; v1(227.425,58.8) 227.425,58.565 227.8,58.19 227.8,50.175 v1(227.834,50.141)
  Bottom Layer w0.4: v1(207.35,63.3) 207.35,66.348 204.95,68.748 204.95,84.368 223.025,102.443 223.025,107.275 224.707,108.957 251.903,108.957 261.51,99.35 271.318,99.35 272.495,98.173 272.495,98.154 272.595,98.054 U4.11 ; v1(221.925,63.275) 221.999,63.349 224.151,63.349 227.425,60.075 v1(227.425,58.8) ; v1(227.834,50.141) 229.075,50.141 229.269,50.335 235.61,50.335 237.1,51.825 U1.17
VCC: C2.2 C5.1 C6.2 C9.1 C10.2 C11.1 J1.2 Q1.9 R1.1 R12.2 R13.2 R14.2 R16.2 R17.2 R20.2 R21.2 R22.2 U1.20 U2.3 U3.3 U4.16 | length 291.2
  Top Layer w0.4: v1(246.425,43.15) v1(251.85,43.15) ; v1(279.885,56.695) 279.937,56.748 291.373,56.748 v1(291.425,56.8)
  Bottom Layer w0.4: R17.2 210.275,77.5 209.2,76.425 209.2,71.95 219.6,61.55 223.709,61.55 224.834,60.425 224.834,59.366 Q1.9@225,59.2 ; 225.05,77.45 225.1,77.5 ; R22.2 R14.2 R13.2 R21.2 247.25,43.192 246.467,43.192 v1(246.425,43.15) ; U1.20 244.72,45.722 v1@246.859,43.584 ; v1(251.85,43.15) 258.65,36.35 281.3,36.35 284.55,39.6 289.875,39.6 291.4,41.125 ; R20.2 272.792,58.268 272.792,56.657 272.825,56.625 275.135,56.625 J1.2 275.395,56.695 v1(279.885,56.695)
  Bottom Layer w0.6: C9.1 291.4,74.279 291.9,74.779
  Bottom Layer w0.8: R17.2 225.1,77.5 R16.2 264.3,77.5 279.925,61.875 279.925,56.735 v1(279.885,56.695) ; C11.1@281.121,95.252 281.369,95.5 282.3,95.5 284.15,93.65 284.15,81.625 287.875,77.9 C6.2 ; v1@291.4,56.8 291.4,41.125 291.4,38.4 296.8,33 R1.1 ; v1(291.425,56.8) 291.425,73.875 C9.1 295.275,70.025 295.275,63.075 294.3,62.1 294.3,61.4 C5.1 R12.2 294.2,58 294.9,57.3 U2.3 ; 291.9,74.779 U3.3
VIN: D2.1 D3.1 K1.5 K2.5 | length 37.9
  Bottom Layer w0.8: D2.1 211.87,47.5 214.525,47.5 215.5,47.5 217.98,45.02 K1.5 ; 215.625,47.375 227.56,47.375 227.621,47.436 228.266,47.436 D3.1 228.514,47.456 229.594,47.456 234.58,42.47 K2.5@234.58,38.98
Volt: JP1.3 R23.1 R24.1 | length 11.9
  Bottom Layer w0.6: R24.1@270.85,19.65 R24.1
  Bottom Layer w0.8: JP1.3 267.795,19.995 267.55,19.75 267.55,19.65 R24.1@270.85,19.65
pads on no net: -1.3 K1.2 K2.2 Q1.7 Q1.10 RST1.3 U4.7 U4.8 U4.9 U4.10

## Polygon pours and split planes (outlines as drawn)
VCC on Bottom Layer "VCC_L02_P001" (solid, pour order 1): 278.975,100 279,99.975 279,95.55 282.95,95.55 282.975,95.575 282.925,95.625 282.925,100
VCC on Bottom Layer "VCC_L02_P000" (solid, remove dead copper, pour order 0): 288.6,78.2 292.7,78.2 292.7,73.2 288.6,73.2

## Keep-outs
Keep-Out Layer:
  the board outline again, w0.3

## Text inside footprints (layer, text, board x,y; h text height)
D2: Top Overlay "K" at 213.451,43.76 h1.02 r270
D3: Top Overlay "K" at 229.3,44.4 h1.02 r270
D4: Top Overlay "K" at 241.216,44.268 h1.02 r270
D5: Top Overlay "K" at 250.6,44.4 h1.02 r270
DS1: Top Overlay "a" at 237.192,101.978 h0.76; Top Overlay "f" at 235.668,99.819 h0.76; Top Overlay "d" at 237.319,93.088 h0.76; Top Overlay "c" at 238.97,94.739 h0.76; Top Overlay "e" at 235.668,94.612 h0.76; Top Overlay "b" at 238.97,99.946 h0.76; Top Overlay "p" at 241.256,93.85 h0.76; Top Overlay "g" at 237.319,98.676 h0.76